# Altium PCB SWD_Adapter_PCB.PcbDoc
Units mil, origin at the board's own origin, x right, y up, seen from the top; angles counter-clockwise.
Board outline 985 x 650 mil, 2 copper layers (Top Layer, Bottom Layer); 6 components, 9 nets, 29 pads, 58 vias.
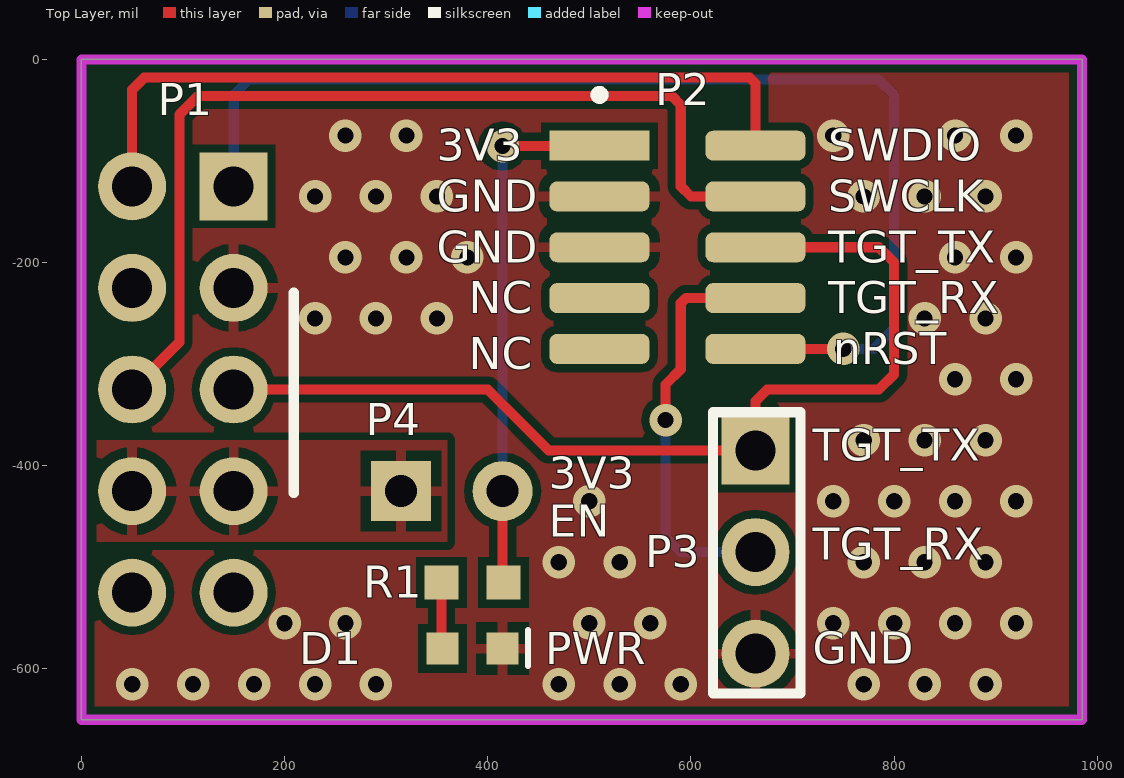
[diagram p0: Top Layer view]
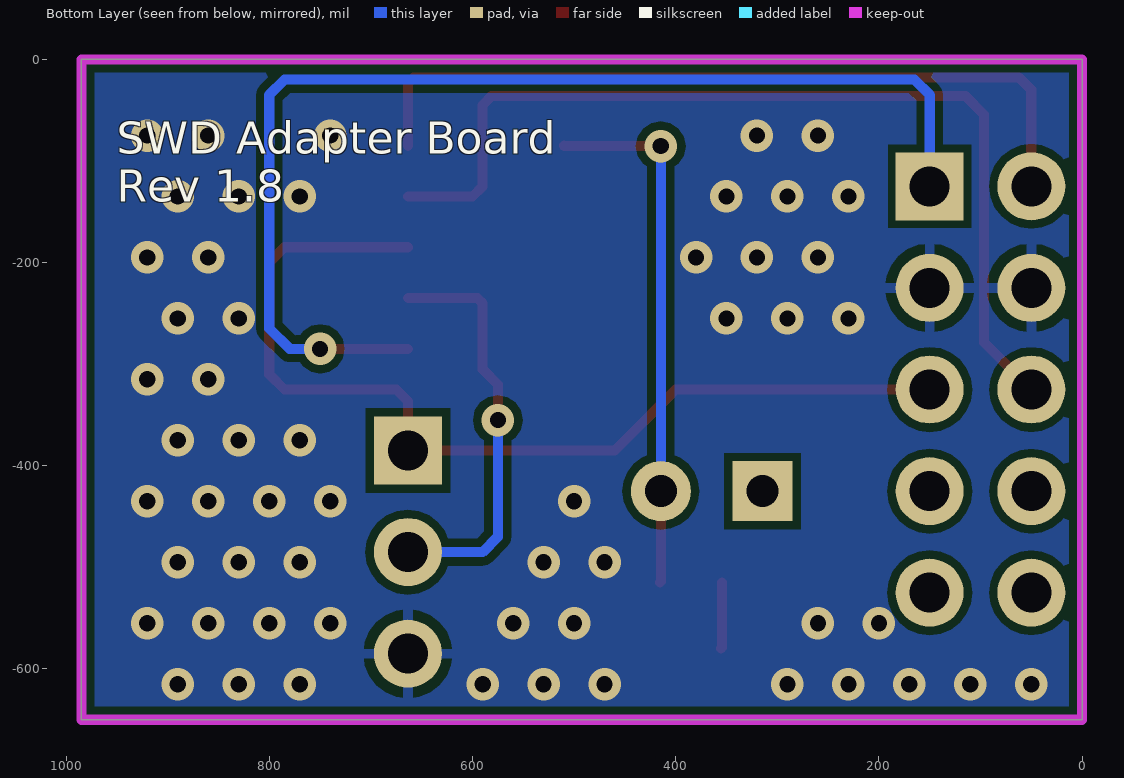
[diagram p1: Bottom Layer view, seen from below]
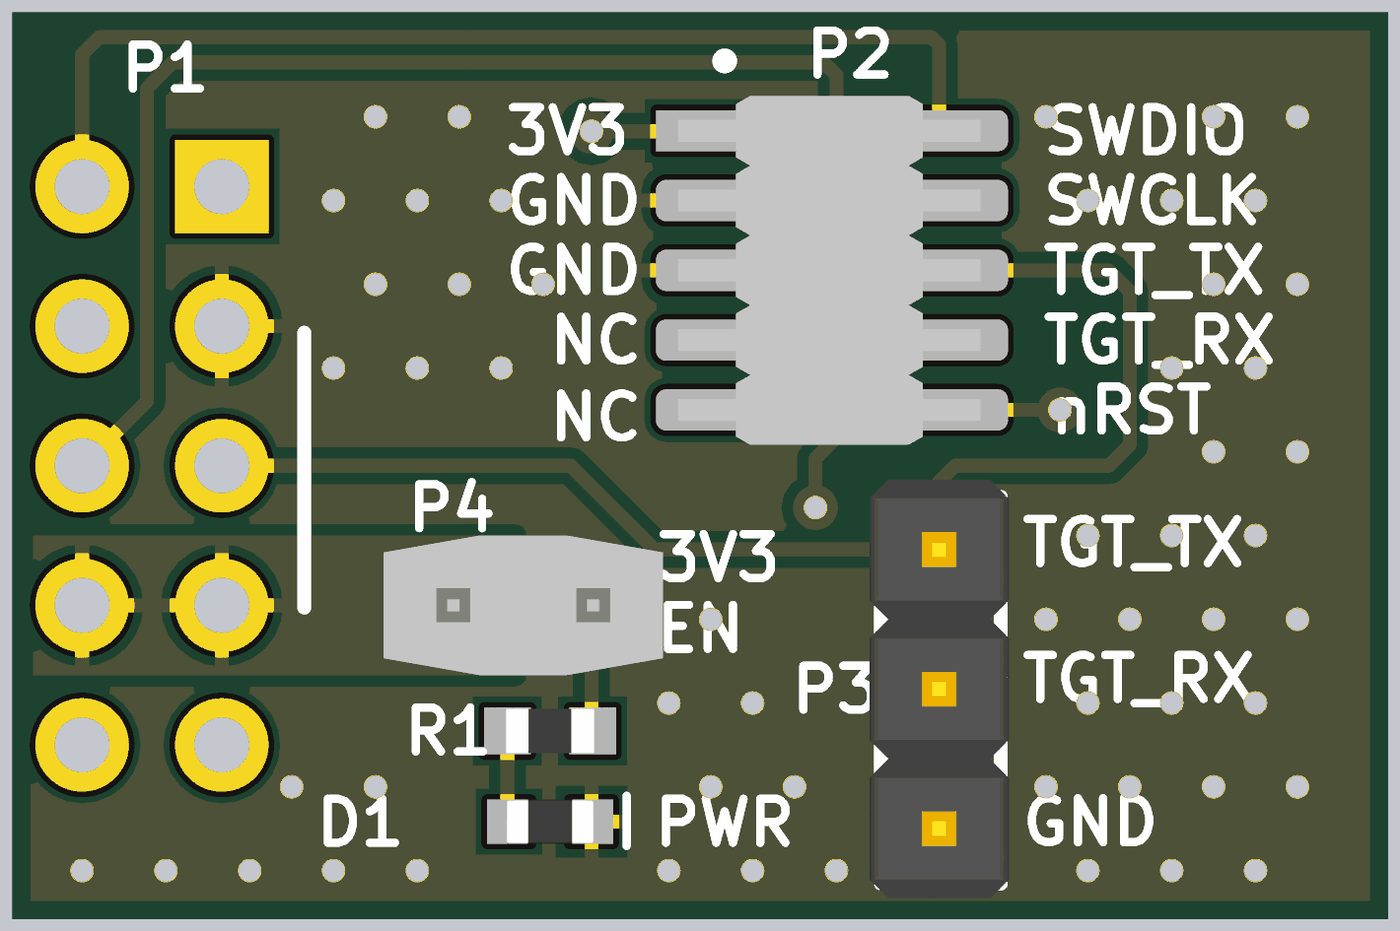
[diagram p2: 3D render of the assembled board from above, using the file's embedded part models]

## Layer stack, top to bottom
Top Solder: solder mask 0.4, Solder Resist, Dk 3.5
Top Layer: signal copper 1.4
Dielectric 1: dielectric 12.6, FR-4, Dk 4.8
Bottom Layer: signal copper 1.4
Bottom Solder: solder mask 0.4, Solder Resist, Dk 3.5

## Board outline
0,0 0,-650 985,-650 985,0

## Design rules (kind name [scope] priority, off if disabled: settings)
Clearance [All] p1: gap=8
PolygonConnect PolygonConnect_1 [All vs IsPad] p1: connectstyle=Relief reliefconductorwidth=10 reliefentries=4 polygonreliefangle="90 Angle" airgapwidth=10
PolygonConnect [All vs IsVia] p2: connectstyle=Direct reliefconductorwidth=10 reliefentries=4 polygonreliefangle="90 Angle" airgapwidth=10
RoutingVias [All] p1: holewidth=28 width=50 viastyle="Through Hole" minholewidth=28 minwidth=50 maxholewidth=28 maxwidth=50
SilkToSolderMaskClearance [IsPad] p1: minsilkscreentomaskgap=7 clearancetoexposedcopper=TRUE
SolderMaskExpansion [All] p1: expansion=4
Width [All] p1: maxlimit=100 minlimit=8 preferedwidth=10
29 further rules are at their usual default settings.

## Components (designator, comment, footprint, x,y, rotation, side; value= is the part's Value field where it differs from the comment)
D1 "LED GREEN CLEAR 2V 0603" LED_0603 357.52,-580.39 r0 top
P1 "CONN 10POS HEADR FMALE 0.1\"" "CONN ,10 POS Header 0.100\"" 150,-525 r90 top
P2 "CONN 10POS HEADR MALE 0.05\"" "CONN, 10POS 0.05\" Debug Header" 510,-85 r270 top
P3 "CONN 3POS HEADR MALE 0.1\"" "CONN, 3POS 0.100\" Header, 1 ROW" 663.54,-385 r270 top
P4 "JUMPER" "CONN 2POS JUMPER 0.1\"" 314.61,-425 r0 top
R1 "RES 510 OHM 5% 1/10W 0603" "RES, 0603" 385,-515 r180 top

## Footprints (in the part's own frame and the unit in brackets; to place one, negate y for a bottom-side part, rotate by r counter-clockwise, add the part's x,y. Pads: shape width x height; smd on the part's side, far side on the other; paste and mask are expansions set on the pad)
"CONN 2POS JUMPER 0.1\"" [mm]
  rect 1.5x1.5 hole 0.8: 1(0,0)
  round 1.5 hole 0.8: 2(2.54,0)
  body extent -1.24,-1.27 3.84,1.27, height 9.25
"CONN ,10 POS Header 0.100\"" [mm]
  rect 1.7x1.7 hole 1: 1(10.16,0)
  round 1.7 hole 1: 2(10.16,2.54) 3(7.62,0) 4(7.62,2.54) 5(5.08,0) 6(5.08,2.54) 7(2.54,0) 8(2.54,2.54) 9(0,0) 10(0,2.54)
  silkscreen extent 2.5,-1.5 7.5,-1.5
"CONN, 3POS 0.100\" Header, 1 ROW" [mm] "Connector, 3 position 0.1\" (2.54mm) Through Hole Generic Header"
  rect 1.7x1.7 hole 1: 1(0,0)
  round 1.7 hole 1: 2(2.54,0) 3(5.08,0)
  silkscreen extent -0.95,-1.06 6.08,1.12, body extent -1.27,-1.27 6.35,1.27, height 9.5
"CONN, 10POS 0.05\" Debug Header" [mm] "Amphenol 10 Positions Header Connector 0.050\" (1.27mm) Surface Mount Gold"
  rect 0.75x2.5 smd: 1(0,0)
  rrect50% 0.75x2.5 smd: 2(0,3.9) 3(1.27,0) 4(1.27,3.9) 5(2.54,0) 6(2.54,3.9) 7(3.81,0) 8(3.81,3.9) 9(5.08,0) 10(5.08,3.9)
  silkscreen extent -1.37,-0.1 -1.17,0.1, body extent -0.63,-0.84 5.72,4.66, height 4.5
LED_0603 [mm]
  rect 0.8x0.8 smd: 1(-0.05,0.01) 2(1.45,0.01)
  silkscreen extent 2.09,-0.43 2.09,0.48, body extent -0.1,-0.39 1.5,0.41, height 0.55
"RES, 0603" [mm] "Chip Resistor, 2-Leads, Body 1.60x0.80mm, IPC Medium Density"
  rect 0.85x0.85 smd: 1(-0.775,0) 2(0.775,0)
  body extent -0.8,-0.4 0.8,0.4, height 0.55

## Part data
D1: "Green 572nm LED Indication - Discrete 2V 0603 (1608 Metric)"
P1: "10 Position Header Connector 0.100\" (2.54mm) Through Hole, Right Angle Gold"
P2: "10 Positions Header Connector 0.050\" (1.27mm) Surface Mount Gold"
P3: "3 Positions Header Connector 0.100\" (2.54mm) Through Hole Gold"
P4: library part "CONN 2POS JUMPER 0.1\"", "2 Positions Header Connector Through Hole Gold"
R1: "RES SMD 510 OHM 5% 1/10W 0603"

## Via types
v1: diameter 32, hole 16, Top Layer to Bottom Layer, tented both sides, 58 vias

## Nets (pads, with @x,y where several pads share a name; then routed paths per layer and width w, separated by ;. In a path a pad name is that pad's centre, name@x,y a point inside that pad or via, vN(x,y) a via of type N, cw(c..) or ccw(c..) an arc to the next point about the centre after c; other vN are vias at no path point)
3V3_IN: P1.7 P1.8 P4.1
3V3_OUT: P2.1 P4.2 R1.1 | length 526.1
  Top Layer w10: P4.2 414.61,-514.09 R1.1 ; v1(414.61,-85.39) 509.61,-85.39 P2.1
  Bottom Layer w10: P4.2 v1(414.61,-85.39) v1@415,-85
GND: D1.2 P1.3 P1.4 P2.3 P2.5 P3.3
  other v1: 50,-615 110,-615 170,-615 230,-615 290,-615 470,-615 530,-615 590,-615 770,-615 830,-615 890,-615 200,-555 260,-555 500,-555 560,-555 740,-555 800,-555 860,-555 920,-555 470,-495 530,-495 770,-495 830,-495 890,-495 500,-435 740,-435 800,-435 860,-435 920,-435 770,-375 830,-375 890,-375 860,-315 920,-315 230,-255 290,-255 350,-255 830,-255 890,-255 260,-195 320,-195 380,-195 860,-195 920,-195 230,-135 290,-135 350,-135 770,-135 830,-135 890,-135 260,-75 320,-75 740,-75 860,-75 920,-75
NetD1_1: D1.1 R1.2 | length 65.4
  Top Layer w10: R1.2 354.49,-578.94 D1.1
RST: P1.1 P2.10 | length 1127.2
  Top Layer w10: P2.10 v1(750,-285)
  Bottom Layer w10: P1.1 150,-35 165,-20 785,-20 800,-35 800,-265 780,-285 v1(750,-285)
SWCLK: P1.6 P2.4 | length 952.3
  Top Layer w10: P1.6 96.46,-278.54 96.46,-54.54 115,-36 581,-36 590,-45 590,-125 600,-135 P2.4
SWDIO: P1.2 P2.2 | length 777.3
  Top Layer w10: P1.2 50,-30 62,-18 658,-18 663.54,-23.54 P2.2
TGT_UART_RX: P2.8 P3.2 | length 406.6
  Top Layer w10: v1(575,-355) 575,-320 590,-305 590,-240 595,-235 P2.8
  Bottom Layer w10: v1(575,-355) 575,-470 590,-485 P3.2
TGT_UART_TX: P1.5 P2.6 P3.1 | length 987
  Top Layer w10: P1.5 400,-325 460,-385 P3.1 663.54,-336.46 675,-325 785,-325 800,-310 800,-200 785,-185 P2.6
pads on no net: P1.9 P1.10 P2.7 P2.9

## Polygon pours and split planes (outlines as drawn)
GND on Bottom Layer "Bottom Layer GND Fill" (solid, remove dead copper, pour order 8): -3.25,3.25 -3.25,-1.75 -3.25,-650 985,-650 985,3.25
GND on Top Layer "Top Layer GND Pour" (solid, remove dead copper, pour order 7): -3.25,3.25 -3.25,-651.75 986.75,-651.75 986.75,3.25 796.75,3.25
3V3_IN on Top Layer "3V3_IN_L01_P006" (solid, pour order 6): 15,-375 360,-375 360,-475 15,-475

## Keep-outs
Keep-Out Layer:
  the board outline again, w10

## Silkscreen, mask and mechanical layers (free items; w line width, h text height)
Top Overlay:
  text "3V3" at 350,-100 h31.5
  text "SWDIO" at 735,-100 h31.5
  text "GND" at 350,-150 h31.5
  text "SWCLK" at 735,-150 h31.5
  text "GND" at 350,-200 h31.5
  text "TGT_TX" at 735,-200 h31.5
  text "NC" at 381.49,-250 h31.5
  text "TGT_RX" at 735,-250 h31.5
  text "nRST" at 740,-300 h31.5
  text "NC" at 381.49,-305 h31.5
  text "TGT_TX" at 720,-395 h31.5
  text "3V3 / EN" at 460,-470 h31.5
  text "TGT_RX" at 720,-492.38 h31.5
  text "PWR" at 456.57,-595.39 h31.5
  text "GND" at 720,-595 h31.5
Bottom Overlay:
  text "SWD Adapter Board / Rev 1.8" at 950,-140 h31.5